# Altium PCB praline.PcbDoc (part 2 of 8)
Units mm, origin at the board's own origin, x right, y up, seen from the top; angles counter-clockwise.
Board outline 152.4 x 101.6 mm, 6 copper layers (In2.Cu, F.Cu, B.Cu, In1.Cu, In3.Cu, In4.Cu); 581 components, 490 nets, 2812 pads, 953 vias.
Unrouted connection lines stored in the file: 404.
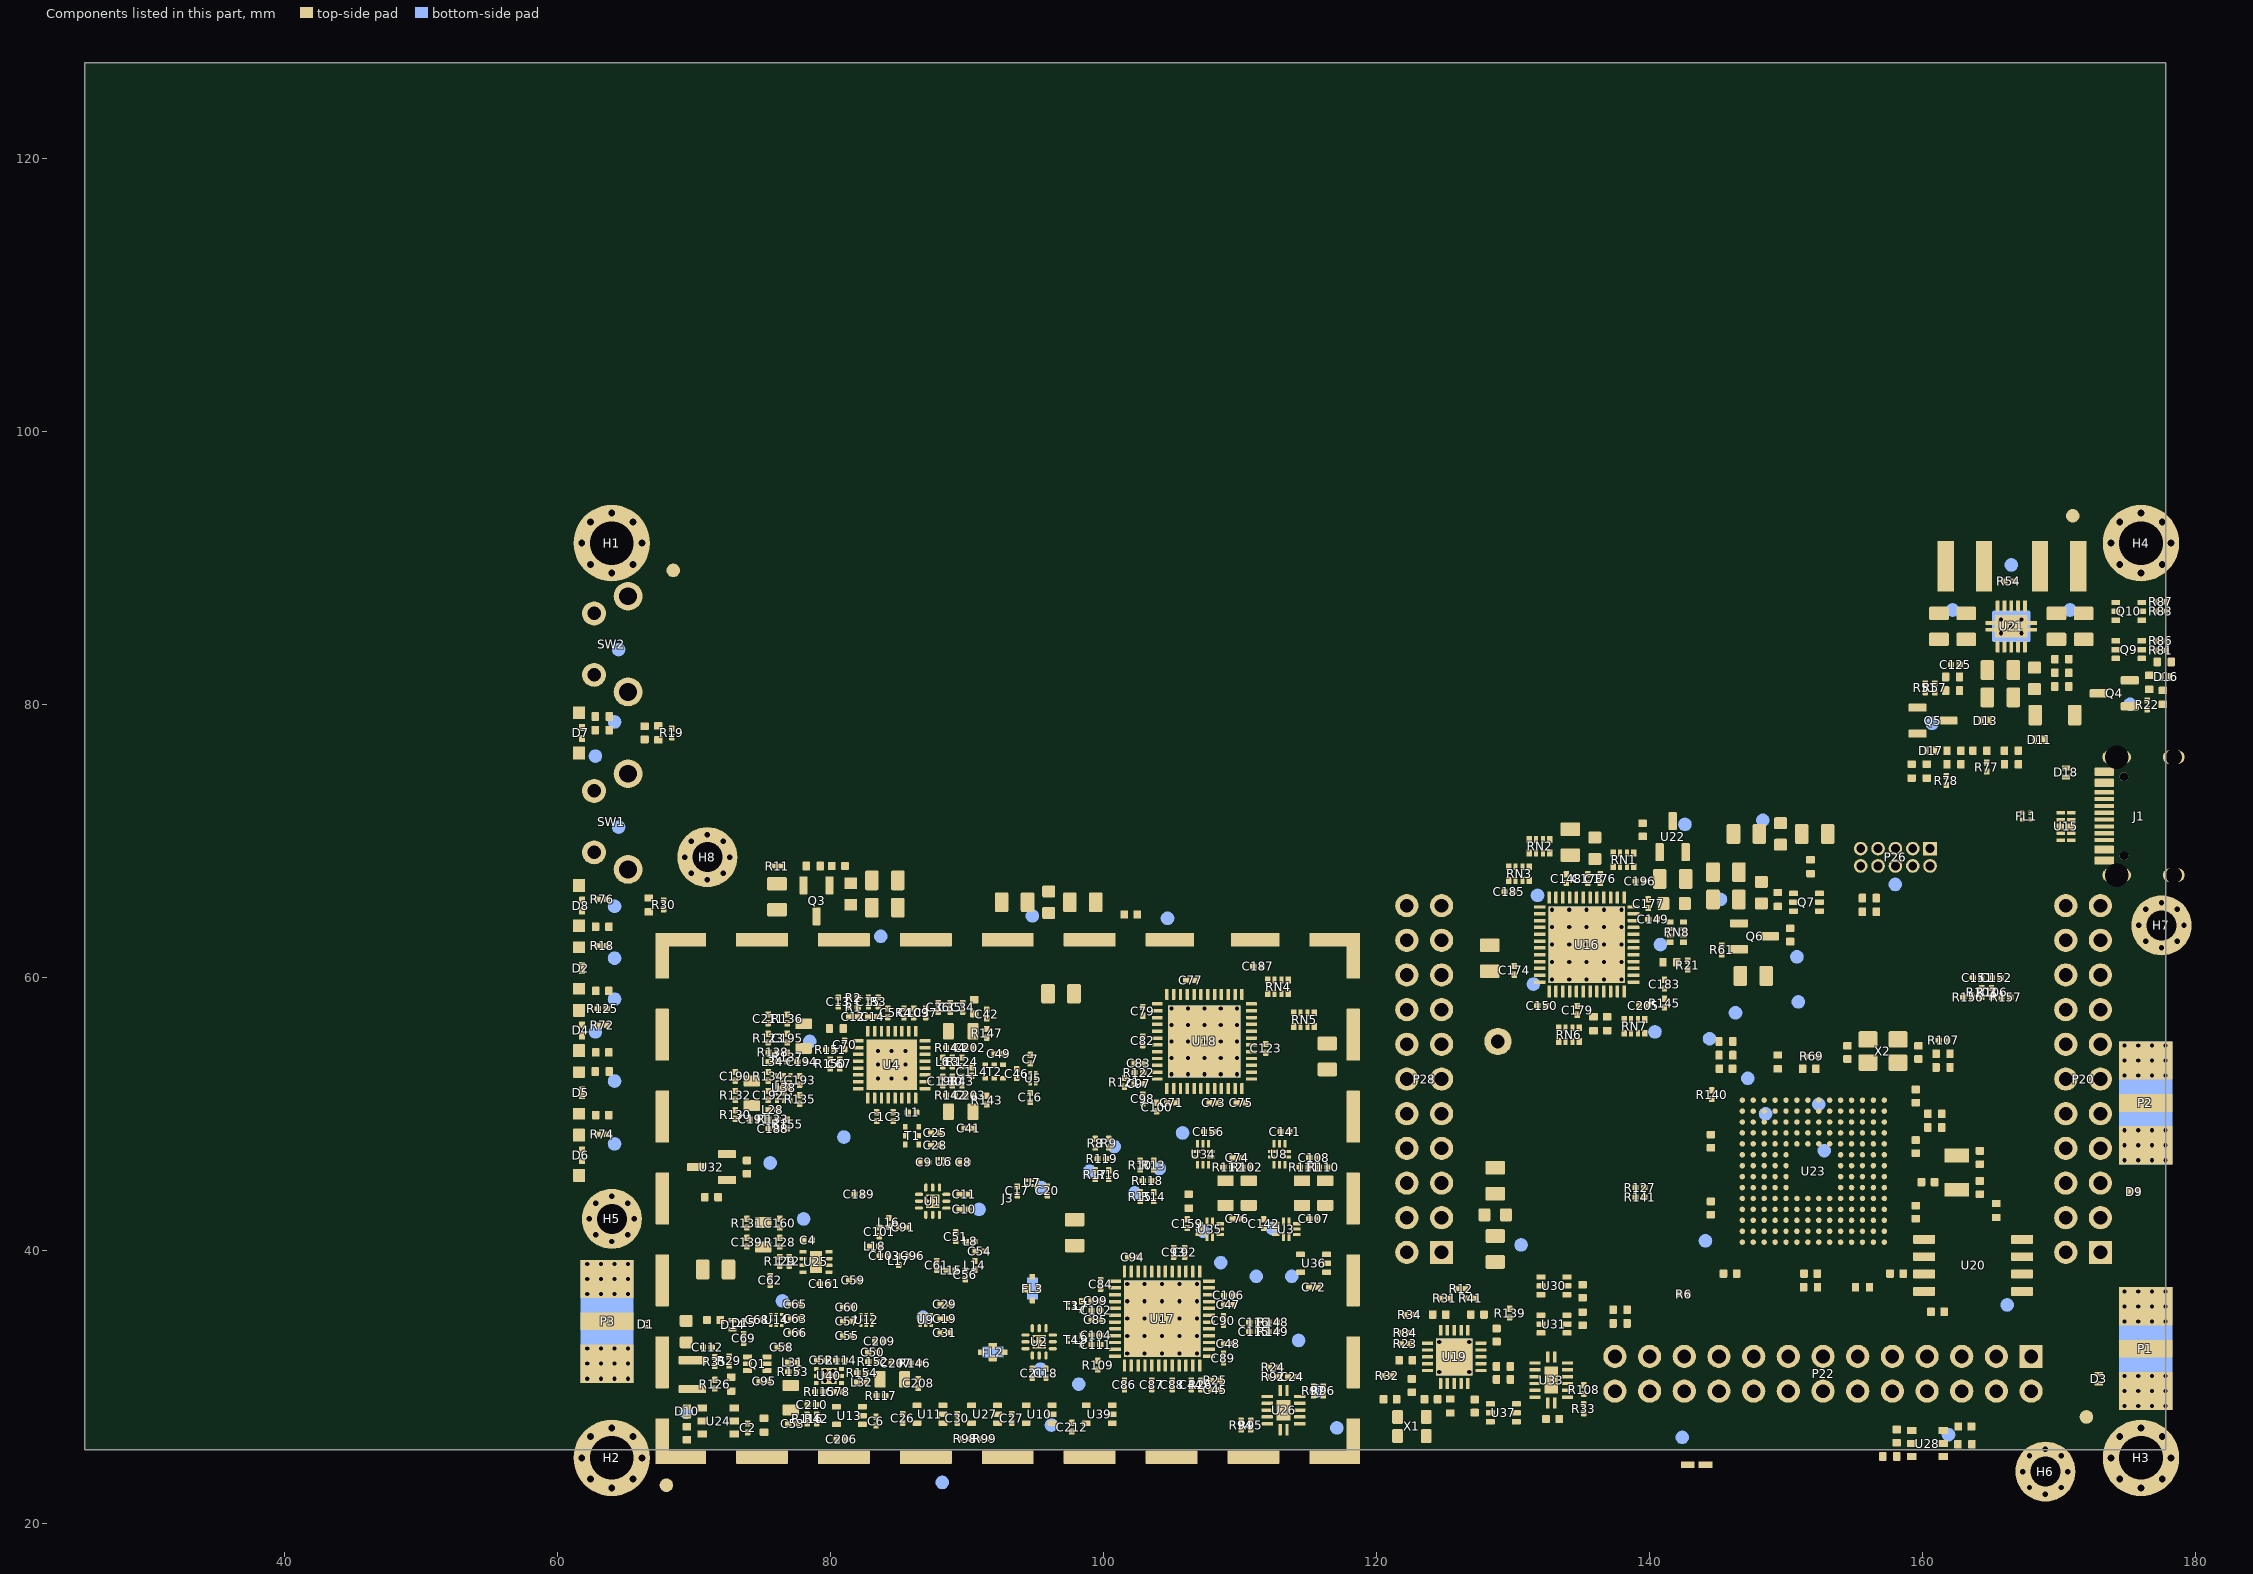
[diagram p6: the components of this part, seen from the top]

## Components (designator, comment, footprint, x,y, rotation, side; value= is the part's Value field where it differs from the comment) (continued)
R119 "Comment" R_0201_0603Metric 99.9,46.72 r180 top value=DNP
R120 "Comment" R_0402_1005Metric 80.45,56.27 r0 top value=10k
R121 "Comment" R_0201_0603Metric 101.55,52.32 r90 top value=12k
R122 "Comment" R_0201_0603Metric 102.6,53.02 r180 top value=4.7k
R123 "Comment" R_0201_0603Metric 75.45,55.57 r90 top value=10
R124 "Comment" R_0201_0603Metric 89.65,53.82 r270 top value=220
R125 "Comment" R_0201_0603Metric 63.3,57.72 r0 top value=12k
R126 "Comment" R_0201_0603Metric 71.55,30.22 r90 top value=4.7k
R127 "Comment" R_0201_0603Metric 139.3,44.62 r0 top value=100
R128 "Comment" R_0201_0603Metric 76.3,40.62 r90 top value=220
R129 "Comment" R_0201_0603Metric 76.3,39.22 r90 top value=1k
R130 "Comment" R_0201_0603Metric 73.05,49.97 r270 top value=220
R131 "Comment" R_0201_0603Metric 73.9,42.02 r270 top value=220
R132 "Comment" R_0201_0603Metric 73.05,51.37 r90 top value=470
R133 "Comment" R_0201_0603Metric 75.8,49.62 r180 top value=1k
R134 "Comment" R_0201_0603Metric 75.45,52.77 r270 top value=180
R135 "Comment" R_0201_0603Metric 77.75,51.07 r90 top value=12k
R136 "Comment" R_0201_0603Metric 76.85,56.97 r270 top value=220
R137 "Comment" R_0201_0603Metric 76.85,54.17 r270 top value=470
R138 "Comment" R_0201_0603Metric 75.8,54.52 r0 top value=1k
R139 "Comment" R_0201_0603Metric 129.75,35.42 r270 top value=33
R140 "Comment" R_0201_0603Metric 144.55,51.42 r90 top value=100
R141 "Comment" R_0201_0603Metric 139.3,43.92 r180 top value=100
R142 "Comment" R_0201_0603Metric 88.8,51.37 r180 top value=33
R143 "Comment" R_0201_0603Metric 91.45,51.02 r90 top value=100
R144 "Comment" R_0201_0603Metric 88.8,54.87 r180 top value=1k
R145 "Comment" R_0201_0603Metric 141.1,58.12 r90 top value=100
R146 "Comment" R_0201_0603Metric 86.2,31.77 r180 top value=220
R147 "Comment" R_0201_0603Metric 91.45,55.92 r90 top value=220
R148 "Comment" R_0201_0603Metric 112.4,34.77 r180 top value=100
R149 "Comment" R_0201_0603Metric 112.4,34.07 r0 top value=0
R150 "Comment" R_0201_0603Metric 80,53.67 r90 top value=0
R151 "Comment" R_0201_0603Metric 80,54.72 r180 top value=1k
R152 "Comment" R_0201_0603Metric 83.1,31.87 r180 top value=3
R153 "Comment" R_0201_0603Metric 77.25,31.12 r180 top value=1k
R154 "Comment" R_0201_0603Metric 82.3,31.07 r0 top value=1k
R155 "Comment" R_0201_0603Metric 76.85,49.27 r270 top value=10
R156 "Comment" R_0201_0603Metric 163.3,58.57 r180 top value=330
R157 "Comment" R_0201_0603Metric 166.1,58.57 r0 top value=330
RN1 "Comment" R_Array_Convex_4x0402 138.1,68.62 r90 top value=100
RN2 "Comment" R_Array_Convex_4x0402 131.95,69.62 r90 top value=100
RN3 "Comment" R_Array_Convex_4x0402 130.45,67.62 r90 top value=100
RN4 "Comment" R_Array_Convex_4x0402 112.8,59.32 r270 top value=100
RN5 "Comment" R_Array_Convex_4x0402 114.7,56.92 r270 top value=100
RN6 "Comment" R_Array_Convex_4x0402 134.1,55.82 r270 top value=100
RN7 "Comment" R_Array_Convex_4x0402 138.9,56.42 r270 top value=100
RN8 "Comment" R_Array_Convex_4x0402 142,63.32 r0 top value=100
SW1 "Comment" SW_Tactile_SPST_Angled_PTS645Vx58-2LFS 62.7,69.17 r90 top value=SWITCH
SW2 "Comment" SW_Tactile_SPST_Angled_PTS645Vx58-2LFS 62.7,82.17 r90 top value=SWITCH
T1 "Comment" Anaren_0805_2012Metric-6 86,48.42 r180 top value=RF_BALUN
T2 "Comment" Anaren_0805_2012Metric-6 92,53.12 r270 top value=RF_BALUN
T3 "Comment" Balun_TDK_TFSZ06052460-3310A2X 97.65,35.97 r0 top value=IF_BALUN
T4 "Comment" Balun_TDK_TFSZ06052460-3310A2X 97.65,33.47 r0 top value=IF_BALUN
TP1 "Comment" TestPoint_Pad_D1.0mm 142.6,71.22 r0 bottom value=TestPoint
TP2 "Comment" TestPoint_Pad_D1.0mm 145.2,65.72 r0 bottom value=TestPoint
TP3 "Comment" TestPoint_Pad_D1.0mm 75.6,46.42 r0 bottom value=TestPoint
TP4 "Comment" TestPoint_Pad_D1.0mm 83.7,63.02 r0 bottom value=TestPoint
TP5 "Comment" TestPoint_Pad_D1.0mm 148.5,50.02 r0 bottom value=TestPoint
TP6 "Comment" TestPoint_Loop_D1.80mm_Drill1.0mm_Beaded 128.9,55.32 r0 top value=TestPoint
TP7 "Comment" TestPoint_Pad_D1.0mm 64.2,78.72 r0 bottom value=TestPoint
TP8 "Comment" TestPoint_Pad_D1.0mm 62.8,76.22 r0 bottom value=TestPoint
TP9 "Comment" TestPoint_Pad_D1.0mm 64.2,65.22 r0 bottom value=TestPoint
TP10 "Comment" TestPoint_Pad_D1.0mm 64.2,61.42 r0 bottom value=TestPoint
TP11 "Comment" TestPoint_Pad_D1.0mm 64.2,58.42 r0 bottom value=TestPoint
TP12 "Comment" TestPoint_Pad_D1.0mm 62.8,56.02 r0 bottom value=TestPoint
TP13 "Comment" TestPoint_Pad_D1.0mm 64.2,52.42 r0 bottom value=TestPoint
TP14 "Comment" TestPoint_Pad_D1.0mm 64.2,47.82 r0 bottom value=TestPoint
TP15 "Comment" TestPoint_Pad_D1.0mm 94.8,64.52 r0 bottom value=TestPoint
TP16 "Comment" TestPoint_Pad_D1.0mm 130.6,40.42 r0 bottom value=TestPoint
TP17 "Comment" TestPoint_Pad_D1.0mm 161.9,26.52 r0 bottom value=TestPoint
TP18 "Comment" TestPoint_Pad_D1.0mm 162.2,86.92 r0 bottom value=TestPoint
TP19 "Comment" TestPoint_Pad_D1.0mm 170.8,86.92 r0 bottom value=TestPoint
TP20 "Comment" TestPoint_Pad_D1.0mm 175.2,80.02 r0 bottom value=TestPoint
TP21 "Comment" TestPoint_Pad_D1.0mm 160.7,78.62 r0 bottom value=TestPoint
TP22 "Comment" TestPoint_Pad_D1.0mm 148.3,71.52 r0 bottom value=TestPoint
TP23 "Comment" TestPoint_Pad_D1.0mm 166.5,90.22 r0 bottom value=TestPoint
TP24 "Comment" TestPoint_Pad_D1.0mm 147.2,52.62 r0 bottom value=TestPoint
TP25 "Comment" TestPoint_Pad_D1.0mm 152.8,47.32 r0 bottom value=TestPoint
TP26 "Comment" TestPoint_Pad_D1.0mm 150.9,58.22 r0 bottom value=TestPoint
TP27 "Comment" TestPoint_Pad_D1.0mm 158,66.82 r0 bottom value=TestPoint
TP28 "Comment" TestPoint_Pad_D1.0mm 150.8,61.52 r0 bottom value=TestPoint
TP29 "Comment" TestPoint_Pad_D1.0mm 131.8,66.02 r0 bottom value=TestPoint
TP30 "Comment" TestPoint_Pad_D1.0mm 64.5,84.02 r0 bottom value=TestPoint
TP31 "Comment" TestPoint_Pad_D1.0mm 64.5,71.02 r0 bottom value=TestPoint
TP32 "Comment" TestPoint_Pad_D1.0mm 144.1,40.72 r0 bottom value=TestPoint
TP33 "Comment" TestPoint_Pad_D1.0mm 114.3,33.42 r0 bottom value=TestPoint
TP34 "Comment" TestPoint_Pad_D1.0mm 78.5,55.32 r0 bottom value=TestPoint
TP35 "Comment" TestPoint_Pad_D1.0mm 95.45,44.62 r0 bottom value=TestPoint
TP36 "Comment" TestPoint_Pad_D1.0mm 152.4,50.72 r0 bottom value=TestPoint
TP37 "Comment" TestPoint_Pad_D1.0mm 96.2,27.22 r0 bottom value=TestPoint
TP38 "Comment" TestPoint_Pad_D1.0mm 90.9,43.02 r0 bottom value=TestPoint
TP39 "Comment" TestPoint_Pad_D1.0mm 95.4,31.32 r0 bottom value=TestPoint
TP40 "Comment" TestPoint_Pad_D1.0mm 86.8,35.12 r0 bottom value=TestPoint
TP41 "Comment" TestPoint_Pad_D1.0mm 76.5,36.32 r0 bottom value=TestPoint
TP42 "Comment" TestPoint_Pad_D1.0mm 78.05,42.32 r0 bottom value=TestPoint
TP43 "Comment" TestPoint_Pad_D1.0mm 142.4,26.32 r0 bottom value=TestPoint
TP44 "Comment" TestPoint_Pad_D1.0mm 117.1,27.02 r0 bottom value=TestPoint
TP45 "Comment" TestPoint_Pad_D1.0mm 88.2,23.02 r0 bottom value=TestPoint
TP46 "Comment" TestPoint_Pad_D1.0mm 115.6,29.72 r0 bottom value=TestPoint
TP47 "Comment" TestPoint_Pad_D1.0mm 69.45,28.17 r0 bottom value=TestPoint
TP48 "Comment" TestPoint_Pad_D1.0mm 146.3,57.42 r0 bottom value=TestPoint
TP49 "Comment" TestPoint_Pad_D1.0mm 140.8,62.42 r0 bottom value=TestPoint
TP50 "Comment" TestPoint_Pad_D1.0mm 144.4,55.52 r0 bottom value=TestPoint
TP51 "Comment" TestPoint_Pad_D1.0mm 104.7,64.34 r0 bottom value=TestPoint
TP52 "Comment" TestPoint_Pad_D1.0mm 98.2,30.22 r0 bottom value=TestPoint
TP53 "Comment" TestPoint_Pad_D1.0mm 140.4,56.02 r0 bottom value=TestPoint
TP54 "Comment" TestPoint_Pad_D1.0mm 112.4,41.62 r0 bottom value=TestPoint
TP55 "Comment" TestPoint_Pad_D1.0mm 105.8,48.62 r0 bottom value=TestPoint
TP56 "Comment" TestPoint_Pad_D1.0mm 100.8,47.62 r0 bottom value=TestPoint
TP57 "Comment" TestPoint_Pad_D1.0mm 99,45.82 r0 bottom value=TestPoint
TP58 "Comment" TestPoint_Pad_D1.0mm 102.3,44.22 r0 bottom value=TestPoint
TP59 "Comment" TestPoint_Pad_D1.0mm 104.1,46.02 r0 bottom value=TestPoint
TP60 "Comment" TestPoint_Pad_D1.0mm 111.2,38.12 r0 bottom value=TestPoint
TP61 "Comment" TestPoint_Pad_D1.0mm 113.8,38.12 r0 bottom value=TestPoint
TP62 "Comment" TestPoint_Pad_D1.0mm 107.3,41.42 r0 bottom value=TestPoint
TP63 "Comment" TestPoint_Pad_D1.0mm 108.6,39.12 r0 bottom value=TestPoint
TP64 "Comment" TestPoint_Pad_D1.0mm 166.2,36.02 r0 bottom value=TestPoint
TP65 "Comment" TestPoint_Pad_D1.0mm 131.5,59.52 r0 bottom value=TestPoint
TP66 "Comment" TestPoint_Pad_D1.0mm 81,48.32 r0 bottom value=TestPoint
U1 "Comment" QFN-12-1EP_2x2mm_P0.5mm_EP1x1mm 87.5,43.62 r180 top value=MXD8546F
U2 "Comment" QFN-12-1EP_2x2mm_P0.5mm_EP1x1mm 95.3,33.32 r90 top value=MXD8546F
U3 "Comment" GTIC_UQFN-10_1.4x1.8mm_P0.4mm 113.4,41.57 r90 top value=GT4227
U4 "Comment" QFN-32-1EP_5x5mm_P0.5mm_EP3.7x3.7mm_ThermalVias 84.5,53.62 r270 top value=RFFC5072
U5 "Comment" TSLP-6-4_1.1x0.7mm_P0.4mm 94.85,52.62 r180 top value=FM8625H
U6 "Comment" TSLP-6-4_1.1x0.7mm_P0.4mm 88.3,46.52 r90 top value=FM8625H
U7 "Comment" TSLP-6-4_1.1x0.7mm_P0.4mm 94.8,44.97 r270 top value=FM8625H
U8 "Comment" GTIC_UQFN-10_1.4x1.8mm_P0.4mm 112.9,47.07 r0 top value=GT4227
U9 "Comment" MXD8638C 87,34.92 r270 top value=MXD8638C
U10 "Comment" SOT-353_SC-70-5 95.3,28.02 r180 top value=74LVC1G86
U11 "Comment" SOT-353_SC-70-5 87.3,28.02 r180 top value=74LVC1G86
U12 "Comment" MXD8638C 82.65,34.92 r90 top value=MXD8638C
U13 "Comment" SOT-353_SC-70-5 81.4,27.92 r180 top value=74LVC1G86
U14 "Comment" MXD8638C 76.05,34.92 r270 top value=MXD8638C
U15 "Comment" Diodes_UDFN-10_1.0x2.5mm_P0.5mm 170.5,71.07 r180 top value=TVS_USB
U16 "Comment" QFN-48-1EP_7x7mm_P0.5mm_EP5.6x5.6mm_ThermalVias 135.4,62.42 r90 top value=ICE40UP5K
U17 "Comment" QFN-48-1EP_7x7mm_P0.5mm_EP5.6x5.6mm_ThermalVias 104.3,35.02 r0 top value=MAX2831
U18 "Comment" QFN-48-1EP_7x7mm_P0.5mm_EP5.3x5.3mm_ThermalVias 107.4,55.32 r90 top value=MAX5865
U19 "Comment" QFN-20-1EP_4x4mm_P0.5mm_EP2.7x2.7mm_ThermalVias 125.7,32.22 r90 top value=SI5351C
U20 "Comment" SOIC-8_5.3x5.3mm_P1.27mm 163.7,38.92 r180 top value=W25Q32
U21 "Comment" Texas_S-PVSON-N10_ThermalVias 166.5,85.72 r90 top value=TPS62410
U22 "Comment" SOT-23-3 141.7,70.32 r90 top value=LDO_2V5
U23 "Comment" TFBGA-180_12x12mm_Layout14x14_P0.8mm 152,45.82 r270 top value=LPC4330FET180
U24 "Comment" TSOP-6_1.65x3.05mm_P0.95mm 71.8,27.52 r180 top value=AP22652
U25 "Comment" WSON-8-1EP_2x2mm_P0.5mm_EP0.9x1.6mm 78.95,39.17 r180 top value=TRF37C73
U26 "Comment" DHVQFN-14-1EP_2.5x3mm_P0.5mm_EP1x1.5mm 113.2,28.32 r0 top value=74HC00
U27 "Comment" SOT-353_SC-70-5 91.3,28.02 r180 top value=74LVC1G32
U28 "Comment" TSOP-6_1.65x3.05mm_P0.95mm 160.36,25.87 r0 top value=AP22652
U30 "Comment" SOT-363_SC-70-6 133,37.42 r0 top value=74LVC1G3157
U31 "Comment" SOT-363_SC-70-6 133,34.62 r0 top value=74LVC1G3157
U32 "Comment" SOT-23-3 71.3,46.12 r180 top value=LDO_2V5
U33 "Comment" DHVQFN-16-1EP_2.5x3.5mm_P0.5mm_EP1x2mm 132.8,30.52 r180 top value=74HC4051
U34 "Comment" GTIC_UQFN-10_1.4x1.8mm_P0.4mm 107.3,47.07 r0 top value=GT4227
U35 "Comment" GTIC_UQFN-10_1.4x1.8mm_P0.4mm 107.8,41.57 r90 top value=GT4227
U36 "Comment" SOT-353_SC-70-5 115.4,39.07 r180 top value=74LVC1G86
U37 "Comment" SOT-363_SC-70-6 129.3,28.12 r180 top value=74LVC1G3157
U38 "Comment" TSLP-7-1 76.6,51.92 r180 top value=BGB741L7ESD
U39 "Comment" SOT-353_SC-70-5 99.7,28.02 r180 top value=74LVC1G08
U40 "Comment" TSLP-7-1 79.9,30.82 r270 top value=BGB741L7ESD
X1 "Comment" Oscillator_SMD_SeikoEpson_TG2520SMN-xxx-xxxxxx-4Pin_2.5x2.0mm 122.6,27.12 r90 top value=TCXO
X2 "Comment" Crystal_SMD_3225-4Pin_3.2x2.5mm 157.1,54.62 r270 top value=MCU_XTAL
X3 "Comment" Crystal_SMD_3215-2Pin_3.2x1.5mm 162.5,45.72 r270 top value=RTC_XTAL

## Footprints (in the part's own frame and the unit in brackets; to place one, negate y for a bottom-side part, rotate by r counter-clockwise, add the part's x,y. Pads: shape width x height; smd on the part's side, far side on the other; paste and mask are expansions set on the pad)
Anaren_0805_2012Metric-6 [mm]
  rect 0.33x0.41 smd mask+0.05: 1(-0.495,0.65) 2(-0.495,0) 3(-0.495,-0.65) 4(0.495,-0.65) 5(0.495,0) 6(0.495,0.65)
  silkscreen extent -1.04,-1.12 0.64,1.4
Balun_TDK_TFSZ06052460-3310A2X [mm]
  rrect5% 0.18x0.2 smd mask+0.05: 1(-0.19,0.2) 2(-0.19,-0.2) 3(0.19,-0.2) 4(0.19,0.2)
  silkscreen extent -0.65,0.05 -0.45,0.45
C_0201_0603Metric [mm]
  rrect25% 0.46x0.4 smd paste-0.46 mask+0.05: 1(-0.32,0) 2(0.32,0)
  rrect25% 0.318x0.36 on Top Paste mask-0.36: Un1(-0.345,0) Un2(0.345,0)
C_0402_1005Metric [mm]
  rrect25% 0.56x0.62 smd mask+0.05: 1(-0.48,0) 2(0.48,0)
  silkscreen extent -0.11,-0.36 0.11,0.36
C_0805_2012Metric [mm]
  rrect25% 1x1.45 smd mask+0.05: 1(-0.95,0) 2(0.95,0)
  silkscreen extent -0.26,-0.73 0.26,0.73
Crystal_SMD_3215-2Pin_3.2x1.5mm [mm]
  rect 1x1.8 smd mask+0.05: 1(-1.25,0) 2(1.25,0)
  silkscreen extent -0.6,-0.87 0.6,0.87
Crystal_SMD_3225-4Pin_3.2x2.5mm [mm]
  rrect21% 1.2x1.4 smd mask+0.05: 1(-0.85,1.1) 2(-0.85,-1.1) 3(0.85,-1.1) 4(0.85,1.1)
  silkscreen extent -1.85,-0.25 1.4,1.8
D_SOD-123FL [mm]
  rrect25% 1x1.5 smd mask+0.05: 1(-1.45,0) 2(1.45,0)
  silkscreen extent -2.2,-1 1.65,1
DHVQFN-14-1EP_2.5x3mm_P0.5mm_EP1x1.5mm [mm]
  rrect25% 0.25x0.825 smd mask+0.05: 1(-0.25,1.438) 7(-0.25,-1.438) 8(0.25,-1.438) 14(0.25,1.438)
  rrect25% 0.825x0.25 smd mask+0.05: 2(-1.188,1) 3(-1.188,0.5) 4(-1.188,0) 5(-1.188,-0.5) 6(-1.188,-1) 9(1.188,-1) 10(1.188,-0.5) 11(1.188,0) 12(1.188,0.5) 13(1.188,1)
  rect 1x1.5 smd paste-1.5 mask+0.05: 15(0,0)
  rrect25% 0.81x1.21 on Top Paste mask-1.21: Un1(0,0)
  silkscreen extent -1.6,-1.61 1.36,1.94
DHVQFN-16-1EP_2.5x3.5mm_P0.5mm_EP1x2mm [mm]
  rrect25% 0.25x0.825 smd mask+0.05: 1(-0.25,1.687) 8(-0.25,-1.687) 9(0.25,-1.687) 16(0.25,1.687)
  rrect25% 0.825x0.25 smd mask+0.05: 2(-1.188,1.25) 3(-1.188,0.75) 4(-1.188,0.25) 5(-1.188,-0.25) 6(-1.188,-0.75) 7(-1.188,-1.25) 10(1.188,-1.25) 11(1.188,-0.75) 12(1.188,-0.25) 13(1.188,0.25) 14(1.188,0.75) 15(1.188,1.25)
  rect 1x2 smd paste-2 mask+0.05: 17(0,0)
  rrect25% 0.81x0.81 on Top Paste mask-0.81: Un1(0,0.5) Un2(0,-0.5)
  silkscreen extent -1.6,-1.86 1.36,2.19
Diodes_UDFN-10_1.0x2.5mm_P0.5mm [mm]
  rect 0.625x0.25 smd mask+0.05: 1(-0.387,1) 2(-0.387,0.5) 4(-0.387,-0.5) 5(-0.387,-1) 6(0.387,-1) 7(0.387,-0.5) 9(0.387,0.5) 10(0.387,1)
  rect 0.7x0.45 smd mask+0.05: 3(-0.35,0)
  rect 0.575x0.45 smd mask+0.05: 8(0.413,0)
  silkscreen extent -1.17,-1.36 0.5,1.59
Fiducial_1mm_Mask2mm [mm]
  round 1 smd paste-1 mask+0.5: Un1(0,0)
Filter_Pulse_BPF1608LM09R5000A [mm]
  rrect12% 0.425x0.4 smd mask+0.05: 1(-0.863,0) 3(0.863,0)
  rect 1.6x0.8 smd far side paste-1.6 mask-1.6: 2(0,0)
  rrect12% 0.6x0.425 smd mask+0.05: 2(0,-0.463) 4(0,0.463)
  silkscreen extent -1.33,-0.93 0.9,0.5
GTIC_UQFN-10_1.4x1.8mm_P0.4mm [mm]
  rrect25% 0.663x0.225 smd mask+0.05: 1(-0.519,0.2)
  rrect25% 0.563x0.225 smd mask+0.05: 2(-0.569,-0.2) 6(0.569,-0.2) 7(0.569,0.2)
  rrect25% 0.225x0.563 smd mask+0.05: 3(-0.4,-0.768) 4(0,-0.768) 5(0.4,-0.768) 8(0.4,0.768) 9(0,0.768) 10(-0.4,0.768)
  silkscreen extent -1.14,-1.01 0.81,1.34
L_0201_0603Metric [mm]
  rrect25% 0.46x0.4 smd paste-0.46 mask+0.05: 1(-0.32,0) 2(0.32,0)
  rrect25% 0.318x0.36 on Top Paste mask-0.36: Un1(-0.345,0) Un2(0.345,0)
L_0603_1608Metric [mm]
  rrect25% 0.875x0.95 smd mask+0.05: 1(-0.787,0) 2(0.787,0)
  silkscreen extent -0.16,-0.51 0.16,0.51
L_CommonModeChoke_Murata_DLM0NS [mm]
  rrect5% 0.3x0.3 smd mask+0.05: 1(-0.3,0.25) 2(0.3,0.25) 3(-0.3,-0.25) 4(0.3,-0.25)
  silkscreen extent -0.85,-0.53 0.33,0.55
L_Taiyo-Yuden_A251818 [mm]
  rrect20% 0.6x2 smd mask+0.05: 1(-1.05,0) 2(1.05,0)
  silkscreen extent -0.55,-1 0.55,1
L_Taiyo-Yuden_NR-40xx [mm]
  rect 1.2x3.7 smd mask+0.05: 1(-1.4,0) 2(1.4,0)
  silkscreen extent -2,-2.1 2,2.1
L_TDK_MLZ2012_h1.25mm [mm]
  rrect20% 0.8x1.2 smd mask+0.05: 1(-0.9,0) 2(0.9,0)
  silkscreen extent -0.35,-0.7 0.35,0.7
Laird_Technologies_BMI-S-230-F_50.8x38.1mm [mm]
  rrect12% 1x3.35 smd mask+0.05: 1(-25.3,-17.775) 1(-25.3,17.775) 1(25.3,-17.775) 1(25.3,17.775)
  rrect12% 1x3.8 smd mask+0.05: 1(-25.3,-12) 1(-25.3,-6) 1(-25.3,0) 1(-25.3,6) 1(-25.3,12) 1(25.3,-12) 1(25.3,-6) 1(25.3,0) 1(25.3,6) 1(25.3,12)
  rrect12% 3.7x1 smd mask+0.05: 1(-23.95,-18.95) 1(-23.95,18.95) 1(23.95,-18.95) 1(23.95,18.95)
  rrect12% 3.8x1 smd mask+0.05: 1(-18,-18.95) 1(-18,18.95) 1(-12,-18.95) 1(-12,18.95) 1(-6,-18.95) 1(-6,18.95) 1(0,-18.95) 1(0,18.95) 1(6,-18.95) 1(6,18.95) 1(12,-18.95) 1(18,-18.95)
  rrect12% 3.55x1 smd mask+0.05: 1(11.875,18.95) 1(18.125,18.95)
  silkscreen extent -25.75,-19.2 25.55,20.05
LED_Dual_Xinglight_XL-3210_Horizontal [mm]
  rrect12% 0.5x0.44 smd mask+0.05: 1(0.4,-0.55) 2(-0.4,-0.55)
  rrect12% 0.95x0.88 smd mask+0.05: 3(1.475,-0.33) 4(-1.475,-0.33)
  silkscreen extent -2.15,-0.97 1.15,1.13
LED_Single_Xinglight_XL-3210_Horizontal [mm]
  rrect12% 0.85x0.88 smd mask+0.05: 1(-1.525,-0.33) 2(1.525,-0.33)
  rrect12% 0.9x0.44 smd mask+0.05: Un1(0,-0.55)
  silkscreen extent -2.15,-0.97 1.15,1.13
MountingHole_2.2mm_M2_Pad_Via [mm]
  round 0.7 hole 0.4 mask+0.05: 1(-1.65,0) 1(-1.167,-1.167) 1(-1.167,1.167) 1(0,-1.65) 1(0,1.65) 1(1.167,-1.167) 1(1.167,1.167) 1(1.65,0)
  round 4.4 hole 2.2 mask+0.05: 1(0,0)
MountingHole_3.2mm_M3_Pad_Via [mm]
  round 0.8 hole 0.5 mask+0.05: 1(-2.2,0) 1(-1.556,-1.556) 1(-1.556,1.556) 1(0,-2.2) 1(0,2.2) 1(1.556,-1.556) 1(1.556,1.556) 1(2.2,0)
  round 5.6 hole 3.2 mask+0.05: 1(0,0)
MXD8638C [mm]
  rrect12% 0.25x0.25 smd mask+0.05: 1(-0.4,0.4) 2(-0.4,0) 3(-0.4,-0.4) 4(0,-0.4) 5(0.4,-0.4) 6(0.4,0) 7(0.4,0.4) 8(0,0.4) 9(0,0)
  silkscreen extent -0.9,-0.65 0.65,0.7
Oscillator_SMD_SeikoEpson_TG2520SMN-xxx-xxxxxx-4Pin_2.5x2.0mm [mm]
  rrect25% 1x0.8 smd mask+0.05: 1(-0.7,1.05) 2(-0.7,-1.05) 3(0.7,-1.05) 4(0.7,1.05)
  silkscreen extent -1.6,-0.32 1.11,1.25
PinHeader_2x05_P1.27mm_Vertical [mm]
  rect 1x1 hole 0.65 mask+0.05: 1(0,0)
  round 1 hole 0.65 mask+0.05: 2(1.27,0) 3(0,-1.27) 4(1.27,-1.27) 5(0,-2.54) 6(1.27,-2.54) 7(0,-3.81) 8(1.27,-3.81) 9(0,-5.08) 10(1.27,-5.08)
  silkscreen extent -1.18,-5.82 2.45,0.81
PinSocket_2x11_P2.54mm_Vertical_Flipped [mm]
  rect 1.7x1.7 hole 1 mask+0.05: 1(0,0)
  round 1.7 hole 1 mask+0.05: 2(2.54,0) 3(0,-2.54) 4(2.54,-2.54) 5(0,-5.08) 6(2.54,-5.08) 7(0,-7.62) 8(2.54,-7.62) 9(0,-10.16) 10(2.54,-10.16) 11(0,-12.7) 12(2.54,-12.7) 13(0,-15.24) 14(2.54,-15.24) 15(0,-17.78) 16(2.54,-17.78) 17(0,-20.32) 18(2.54,-20.32) 19(0,-22.86) 20(2.54,-22.86) 21(0,-25.4) 22(2.54,-25.4)
  silkscreen extent -1.33,-26.73 3.87,1.33
PinSocket_2x13_P2.54mm_Vertical_Flipped [mm]
  rect 1.7x1.7 hole 1 mask+0.05: 1(0,0)
  round 1.7 hole 1 mask+0.05: 2(2.54,0) 3(0,-2.54) 4(2.54,-2.54) 5(0,-5.08) 6(2.54,-5.08) 7(0,-7.62) 8(2.54,-7.62) 9(0,-10.16) 10(2.54,-10.16) 11(0,-12.7) 12(2.54,-12.7) 13(0,-15.24) 14(2.54,-15.24) 15(0,-17.78) 16(2.54,-17.78) 17(0,-20.32) 18(2.54,-20.32) 19(0,-22.86) 20(2.54,-22.86) 21(0,-25.4) 22(2.54,-25.4) 23(0,-27.94) 24(2.54,-27.94) 25(0,-30.48) 26(2.54,-30.48)
  silkscreen extent -1.33,-31.81 3.87,1.33
QFN-12-1EP_2x2mm_P0.5mm_EP1x1mm [mm]
  rrect100% 0.6x0.25 smd mask+0.05: 1(-1,0.5) 2(-1,0) 3(-1,-0.5) 7(1,-0.5) 8(1,0) 9(1,0.5)
  rrect100% 0.25x0.6 smd mask+0.05: 4(-0.5,-1) 5(0,-1) 6(0.5,-1) 10(0.5,1) 11(0,1) 12(-0.5,1)
  round 0.4 hole 0.3 mask+0.05: 13(-0.25,0.25) 13(-0.25,-0.25) 13(0.25,0.25) 13(0.25,-0.25)
  rect 1x1 smd mask+0.05: 13(0,0)
  silkscreen extent -1.35,-1.1 1.1,1.2
QFN-20-1EP_4x4mm_P0.5mm_EP2.7x2.7mm_ThermalVias [mm]
  rrect25% 0.8x0.25 smd mask+0.05: 1(-1.95,1) 2(-1.95,0.5) 3(-1.95,0) 4(-1.95,-0.5) 5(-1.95,-1) 11(1.95,-1) 12(1.95,-0.5) 13(1.95,0) 14(1.95,0.5) 15(1.95,1)
  rrect25% 0.25x0.8 smd mask+0.05: 6(-1,-1.95) 7(-0.5,-1.95) 8(0,-1.95) 9(0.5,-1.95) 10(1,-1.95) 16(1,1.95) 17(0.5,1.95) 18(0,1.95) 19(-0.5,1.95) 20(-1,1.95)
  round 0.5 hole 0.3 mask+0.05: 21(-1.1,-1.1) 21(-1.1,1.1) 21(1.1,-1.1) 21(1.1,1.1)
  rect 2.7x2.7 smd paste-2.7 mask+0.05: 21(0,0)
  rect 2.7x2.7 smd far side paste-2.7 mask-2.7: 21(0,0)
  rrect21% 1.17x1.17 on Top Paste mask-1.17: Un1(-0.675,0.675) Un2(-0.675,-0.675) Un3(0.675,0.675) Un4(0.675,-0.675)
  silkscreen extent -2.35,-2.11 2.11,2.44
QFN-32-1EP_5x5mm_P0.5mm_EP3.7x3.7mm_ThermalVias [mm]
  rrect25% 0.8x0.25 smd mask+0.05: 1(-2.45,1.75) 2(-2.45,1.25) 3(-2.45,0.75) 4(-2.45,0.25) 5(-2.45,-0.25) 6(-2.45,-0.75) 7(-2.45,-1.25) 8(-2.45,-1.75) 17(2.45,-1.75) 18(2.45,-1.25) 19(2.45,-0.75) 20(2.45,-0.25) 21(2.45,0.25) 22(2.45,0.75) 23(2.45,1.25) 24(2.45,1.75)
  rrect25% 0.25x0.8 smd mask+0.05: 9(-1.75,-2.45) 10(-1.25,-2.45) 11(-0.75,-2.45) 12(-0.25,-2.45) 13(0.25,-2.45) 14(0.75,-2.45) 15(1.25,-2.45) 16(1.75,-2.45) 25(1.75,2.45) 26(1.25,2.45) 27(0.75,2.45) 28(0.25,2.45) 29(-0.25,2.45) 30(-0.75,2.45) 31(-1.25,2.45) 32(-1.75,2.45)
  round 0.5 hole 0.3 mask+0.05: 33(-1,1) 33(-1,0) 33(-1,-1) 33(0,1) 33(0,0) 33(0,-1) 33(1,1) 33(1,0) 33(1,-1)
  rect 3.7x3.7 smd paste-3.7 mask+0.05: 33(0,0)
  rect 2.5x2.5 smd far side paste-2.5 mask-2.5: 33(0,0)
  round 0.602 on Top Paste mask-0.602: Un1(-1.425,1.425) Un4(-1.425,-1.425) Un13(1.425,1.425) Un16(1.425,-1.425)
  round 0.612 on Top Paste mask-0.612: Un2(-1.425,0.5) Un3(-1.425,-0.5) Un5(-0.5,1.425) Un8(-0.5,-1.425) Un9(0.5,1.425) Un12(0.5,-1.425) Un14(1.425,0.5) Un15(1.425,-0.5)
  rrect25% 0.806x0.806 on Top Paste mask-0.806: Un6(-0.5,0.5) Un7(-0.5,-0.5) Un10(0.5,0.5) Un11(0.5,-0.5)
  silkscreen extent -2.85,-2.61 2.61,2.94
QFN-48-1EP_7x7mm_P0.5mm_EP5.3x5.3mm_ThermalVias [mm]
  rrect25% 0.8x0.25 smd mask+0.05: 1(-3.45,2.75) 2(-3.45,2.25) 3(-3.45,1.75) 4(-3.45,1.25) 5(-3.45,0.75) 6(-3.45,0.25) 7(-3.45,-0.25) 8(-3.45,-0.75) 9(-3.45,-1.25) 10(-3.45,-1.75) 11(-3.45,-2.25) 12(-3.45,-2.75) 25(3.45,-2.75) 26(3.45,-2.25) 27(3.45,-1.75) 28(3.45,-1.25) 29(3.45,-0.75) 30(3.45,-0.25) 31(3.45,0.25) 32(3.45,0.75) 33(3.45,1.25) 34(3.45,1.75) 35(3.45,2.25) 36(3.45,2.75)
  rrect25% 0.25x0.8 smd mask+0.05: 13(-2.75,-3.45) 14(-2.25,-3.45) 15(-1.75,-3.45) 16(-1.25,-3.45) 17(-0.75,-3.45) 18(-0.25,-3.45) 19(0.25,-3.45) 20(0.75,-3.45) 21(1.25,-3.45) 22(1.75,-3.45) 23(2.25,-3.45) 24(2.75,-3.45) 37(2.75,3.45) 38(2.25,3.45) 39(1.75,3.45) 40(1.25,3.45) 41(0.75,3.45) 42(0.25,3.45) 43(-0.25,3.45) 44(-0.75,3.45) 45(-1.25,3.45) 46(-1.75,3.45) 47(-2.25,3.45) 48(-2.75,3.45)
  round 0.5 hole 0.3 mask+0.05: 49(-2.4,-2.4) 49(-2.4,-1.2) 49(-2.4,0) 49(-2.4,1.2) 49(-2.4,2.4) 49(-1.2,2.4) 49(-1.2,-1.2) 49(-1.2,0) 49(-1.2,1.2) 49(-1.2,-2.4) 49(0,2.4) 49(0,1.2) 49(0,0) 49(0,-1.2) 49(0,-2.4) 49(1.2,2.4) 49(1.2,-1.2) 49(1.2,0) 49(1.2,1.2) 49(1.2,-2.4) 49(2.4,-2.4) 49(2.4,-1.2) 49(2.4,0) 49(2.4,1.2) 49(2.4,2.4)
  rect 5.3x5.3 smd paste-5.3 mask+0.05: 49(0,0)
  rect 5.3x5.3 smd far side paste-5.3 mask-5.3: 49(0,0)
  rrect24% 1.026x1.026 on Top Paste mask-1.026: Un1(-1.8,1.8) Un2(-1.8,0.6) Un3(-1.8,-0.6) Un4(-1.8,-1.8) Un5(-0.6,1.8) Un6(-0.6,0.6) Un7(-0.6,-0.6) Un8(-0.6,-1.8) Un9(0.6,1.8) Un10(0.6,0.6) Un11(0.6,-0.6) Un12(0.6,-1.8) Un13(1.8,1.8) Un14(1.8,0.6) Un15(1.8,-0.6) Un16(1.8,-1.8)
  silkscreen extent -3.85,-3.61 3.61,3.94
QFN-48-1EP_7x7mm_P0.5mm_EP5.6x5.6mm_ThermalVias [mm]
  rrect25% 0.875x0.25 smd mask+0.05: 1(-3.437,2.75) 2(-3.437,2.25) 3(-3.437,1.75) 4(-3.437,1.25) 5(-3.437,0.75) 6(-3.437,0.25) 7(-3.437,-0.25) 8(-3.437,-0.75) 9(-3.437,-1.25) 10(-3.437,-1.75) 11(-3.437,-2.25) 12(-3.437,-2.75) 25(3.437,-2.75) 26(3.437,-2.25) 27(3.437,-1.75) 28(3.437,-1.25) 29(3.437,-0.75) 30(3.437,-0.25) 31(3.437,0.25) 32(3.437,0.75) 33(3.437,1.25) 34(3.437,1.75) 35(3.437,2.25) 36(3.437,2.75)
  rrect25% 0.25x0.875 smd mask+0.05: 13(-2.75,-3.437) 14(-2.25,-3.437) 15(-1.75,-3.437) 16(-1.25,-3.437) 17(-0.75,-3.437) 18(-0.25,-3.437) 19(0.25,-3.437) 20(0.75,-3.437) 21(1.25,-3.437) 22(1.75,-3.437) 23(2.25,-3.437) 24(2.75,-3.437) 37(2.75,3.437) 38(2.25,3.437) 39(1.75,3.437) 40(1.25,3.437) 41(0.75,3.437) 42(0.25,3.437) 43(-0.25,3.437) 44(-0.75,3.437) 45(-1.25,3.437) 46(-1.75,3.437) 47(-2.25,3.437) 48(-2.75,3.437)
  round 0.5 hole 0.3 mask+0.05: 49(-2.55,-2.55) 49(-2.55,-1.275) 49(-2.55,0) 49(-2.55,1.275) 49(-2.55,2.55) 49(-1.275,2.55) 49(-1.275,-1.275) 49(-1.275,0) 49(-1.275,1.275) 49(-1.275,-2.55) 49(0,2.55) 49(0,1.275) 49(0,0) 49(0,-1.275) 49(0,-2.55) 49(1.275,2.55) 49(1.275,-1.275) 49(1.275,0) 49(1.275,1.275) 49(1.275,-2.55) 49(2.55,-2.55) 49(2.55,-1.275) 49(2.55,0) 49(2.55,1.275) 49(2.55,2.55)
  rect 5.6x5.6 smd paste-5.6 mask+0.05: 49(0,0)
  rect 5.6x5.6 smd far side paste-5.6 mask-5.6: 49(0,0)
  rrect23% 1.084x1.084 on Top Paste mask-1.084: Un1(-1.913,1.913) Un2(-1.913,0.637) Un3(-1.913,-0.637) Un4(-1.913,-1.913) Un5(-0.637,1.913) Un6(-0.637,0.637) Un7(-0.637,-0.637) Un8(-0.637,-1.913) Un9(0.637,1.913) Un10(0.637,0.637) Un11(0.637,-0.637) Un12(0.637,-1.913) Un13(1.913,1.913) Un14(1.913,0.637) Un15(1.913,-0.637) Un16(1.913,-1.913)
  silkscreen extent -3.85,-3.61 3.61,3.94
R_0201_0603Metric [mm]
  rrect25% 0.46x0.4 smd paste-0.46 mask+0.05: 1(-0.32,0) 2(0.32,0)
  rrect25% 0.318x0.36 on Top Paste mask-0.36: Un1(-0.345,0) Un2(0.345,0)
R_0402_1005Metric [mm]
  rrect25% 0.54x0.64 smd mask+0.05: 1(-0.51,0) 2(0.51,0)
  silkscreen extent -0.15,-0.38 0.15,0.38
R_Array_Convex_4x0402 [mm]
  rect 0.5x0.4 smd mask+0.05: 1(-0.5,0.75) 4(-0.5,-0.75) 5(0.5,-0.75) 8(0.5,0.75)
  rect 0.5x0.3 smd mask+0.05: 2(-0.5,0.25) 3(-0.5,-0.25) 6(0.5,-0.25) 7(0.5,0.25)
  silkscreen extent -0.25,-1.18 0.25,1.18
SMA_MyAntenna_A-SMA-KE-16.5A_EdgeMount [mm]
  rect 3.9x1.3 smd paste-3.9 mask+0.05: 1(2.15,0)
  round 0.45 hole 0.3 mask+0.05: 2(0.7,4.2) 2(0.7,3.1) 2(0.7,2) 2(0.7,-2) 2(0.7,-3.1) 2(0.7,-4.2) 2(1.7,2) 2(1.7,3.1) 2(1.7,4.2) 2(1.7,-4.2) 2(1.7,-3.1) 2(1.7,-2) 2(2.7,2) 2(2.7,3.1) 2(2.7,4.2) 2(2.7,-4.2) 2(2.7,-3.1) 2(2.7,-2) 2(3.7,3.1) 2(3.7,4.2) 2(3.7,-2) 2(3.7,2) 2(3.7,-4.2) 2(3.7,-3.1)
  rect 3.9x2.8 smd paste-3.9 mask+0.05: 2(2.15,3.1) 2(2.15,-3.1)
  rect 3.9x2.8 smd far side paste-3.9 mask+0.05: 2(2.15,3.1) 2(2.15,-3.1)
  rect 3.9x9 smd far side paste-9 mask-9: 2(2.15,0)
SOIC-8_5.3x5.3mm_P1.27mm [mm]
  rrect25% 1.625x0.65 smd mask+0.05: 1(-3.588,1.905) 2(-3.588,0.635) 3(-3.588,-0.635) 4(-3.588,-1.905) 5(3.588,-1.905) 6(3.588,-0.635) 7(3.588,0.635) 8(3.588,1.905)
  silkscreen extent -3.76,-2.76 2.76,2.82
SolderJumper-2_P1.3mm_Bridged_RoundedPad1.0x1.5mm [mm]
  rect 1x0.5 smd paste-1 mask+0.05: 1(-0.65,0) 2(0.65,0)
  F.Cu circle w0: c0.65,0.25 r0.5
  F.Cu circle w0: c0.65,-0.25 r0.5
  F.Cu circle w0: c-0.65,0.25 r0.5
  F.Cu circle w0: c-0.65,-0.25 r0.5
  F.Cu region: 0.65,-0.75 0.15,-0.75 0.15,0.75 0.65,0.75
  F.Cu region: -0.15,-0.75 -0.65,-0.75 -0.65,0.75 -0.15,0.75
  F.Cu region: 0.25,-0.3 -0.25,-0.3 -0.25,0.3 0.25,0.3
  silkscreen extent -1.4,-1 1.4,1
SOT-23-3 [mm]
  rrect25% 1.325x0.6 smd mask+0.05: 1(-1.138,0.95) 2(-1.138,-0.95) 3(1.138,0)
  silkscreen extent -1.54,-1.56 0.8,1.84
SOT-353_SC-70-5 [mm]
  rrect25% 0.65x0.4 smd mask+0.05: 1(-0.95,0.65) 2(-0.95,0) 3(-0.95,-0.65) 4(0.95,-0.65) 5(0.95,0.65)
  silkscreen extent -1.32,-1.16 0.7,1.44
SOT-363_SC-70-6 [mm]
  rrect25% 0.65x0.4 smd mask+0.05: 1(-0.95,0.65) 2(-0.95,0) 3(-0.95,-0.65) 4(0.95,-0.65) 5(0.95,0) 6(0.95,0.65)
  silkscreen extent -1.32,-1.16 0.7,1.44
SOT-563 [mm]
  rrect25% 0.675x0.35 smd mask+0.05: 1(-0.713,0.5) 2(-0.713,0) 3(-0.713,-0.5) 4(0.713,-0.5) 5(0.713,0) 6(0.713,0.5)
  silkscreen extent -1.64,-0.93 0.6,0.93
SW_Tactile_SPST_Angled_PTS645Vx58-2LFS [mm]
  round 1.75 hole 0.99 mask+0.05: 1(0,0) 2(4.5,0)
  round 2.1 hole 1.3 mask+0.05: SH(-1.25,-2.49) SH(5.76,-2.49)
  silkscreen extent -1.61,-4.31 6.11,0.9
TestPoint_Loop_D1.80mm_Drill1.0mm_Beaded [mm]
  round 2 hole 1 mask+0.05: 1(0,0)
  silkscreen extent -1.5,-1.5 1.5,1.5
TestPoint_Pad_D1.0mm [mm]
  round 1 smd paste-1 mask+0.05: 1(0,0)
  silkscreen extent -0.7,-0.7 0.7,0.7
Texas_S-PVSON-N10_ThermalVias [mm]
  rrect25% 0.28x0.28 smd paste-0.025 mask+0.05: 1(-1.76,1) 2(-1.76,0.5) 3(-1.76,0) 4(-1.76,-0.5) 5(-1.76,-1) 6(1.76,-1) 7(1.76,-0.5) 8(1.76,0) 9(1.76,0.5) 10(1.76,1)
  rrect100% 0.85x0.28 smd paste-0.025 mask+0.05: 1(-1.475,1) 2(-1.475,0.5) 3(-1.475,0) 4(-1.475,-0.5) 5(-1.475,-1) 6(1.475,-1) 7(1.475,-0.5) 8(1.475,0) 9(1.475,0.5) 10(1.475,1)
  round 0.6 hole 0.3 mask+0.05: 11(-0.5,0.75) 11(-0.5,-0.75) 11(0,0) 11(0.5,0.75) 11(0.5,-0.75)
  rect 0.68x1.05 smd mask+0.05: 11(-0.45,-0.635) 11(-0.45,0.635) 11(0.45,-0.635) 11(0.45,0.635)
  rrect25% 0.28x0.8 smd paste-0.8 mask+0.05: 11(-0.25,1.5) 11(-0.25,-1.5) 11(0.25,1.5) 11(0.25,-1.5)
  rect 0.26x0.5 smd mask+0.05: 11(-0.25,1.6) 11(-0.25,-1.6) 11(0.25,1.6) 11(0.25,-1.6)
  rrect5% 1.65x2.4 smd paste-2.4 mask+0.05: 11(0,0)
  rrect10% 2.3x2.8 smd far side paste-2.8 mask-2.8: 11(0,0)
  silkscreen extent -2.08,-1.63 1.63,1.75
TFBGA-180_12x12mm_Layout14x14_P0.8mm [mm]
  round 0.4 smd mask+0.05: A1(-5.2,5.2) A2(-4.4,5.2) A3(-3.6,5.2) A4(-2.8,5.2) A5(-2,5.2) A6(-1.2,5.2) A7(-0.4,5.2) A8(0.4,5.2) A9(1.2,5.2) A10(2,5.2) A11(2.8,5.2) A12(3.6,5.2) A13(4.4,5.2) A14(5.2,5.2) B1(-5.2,4.4) B2(-4.4,4.4) B3(-3.6,4.4) B4(-2.8,4.4) B5(-2,4.4) B6(-1.2,4.4) B7(-0.4,4.4) B8(0.4,4.4) B9(1.2,4.4) B10(2,4.4) B11(2.8,4.4) B12(3.6,4.4) B13(4.4,4.4) B14(5.2,4.4) C1(-5.2,3.6) C2(-4.4,3.6) C3(-3.6,3.6) C4(-2.8,3.6) C5(-2,3.6) C6(-1.2,3.6) C7(-0.4,3.6) C8(0.4,3.6) C9(1.2,3.6) C10(2,3.6) C11(2.8,3.6) C12(3.6,3.6) C13(4.4,3.6) C14(5.2,3.6) D1(-5.2,2.8) D2(-4.4,2.8) D3(-3.6,2.8) D4(-2.8,2.8) D5(-2,2.8) D6(-1.2,2.8) D7(-0.4,2.8) D8(0.4,2.8) D9(1.2,2.8) D10(2,2.8) D11(2.8,2.8) D12(3.6,2.8) D13(4.4,2.8) D14(5.2,2.8) E1(-5.2,2) E2(-4.4,2) E3(-3.6,2) E4(-2.8,2) E5(-2,2) E6(-1.2,2) E7(-0.4,2) E8(0.4,2) E9(1.2,2) E10(2,2) E11(2.8,2) E12(3.6,2) E13(4.4,2) E14(5.2,2) F1(-5.2,1.2) F2(-4.4,1.2) F3(-3.6,1.2) F4(-2.8,1.2) F5(-2,1.2) F10(2,1.2) F11(2.8,1.2) F12(3.6,1.2) F13(4.4,1.2) F14(5.2,1.2) G1(-5.2,0.4) G2(-4.4,0.4) G3(-3.6,0.4) G4(-2.8,0.4) G5(-2,0.4) G10(2,0.4) G11(2.8,0.4) G12(3.6,0.4) G13(4.4,0.4) G14(5.2,0.4) H1(-5.2,-0.4) H2(-4.4,-0.4) H3(-3.6,-0.4) H4(-2.8,-0.4) H5(-2,-0.4) H10(2,-0.4) H11(2.8,-0.4) H12(3.6,-0.4) H13(4.4,-0.4) H14(5.2,-0.4) J1(-5.2,-1.2) J2(-4.4,-1.2) J3(-3.6,-1.2) J4(-2.8,-1.2) J5(-2,-1.2) J10(2,-1.2) J11(2.8,-1.2) J12(3.6,-1.2) J13(4.4,-1.2) J14(5.2,-1.2) K1(-5.2,-2) K2(-4.4,-2) K3(-3.6,-2) K4(-2.8,-2) K5(-2,-2) K6(-1.2,-2) K7(-0.4,-2) K8(0.4,-2) K9(1.2,-2) K10(2,-2) K11(2.8,-2) K12(3.6,-2) K13(4.4,-2) K14(5.2,-2) L1(-5.2,-2.8) L2(-4.4,-2.8) L3(-3.6,-2.8) L4(-2.8,-2.8) L5(-2,-2.8) L6(-1.2,-2.8) L7(-0.4,-2.8) L8(0.4,-2.8) L9(1.2,-2.8) L10(2,-2.8) L11(2.8,-2.8) L12(3.6,-2.8) L13(4.4,-2.8) L14(5.2,-2.8) M1(-5.2,-3.6) M2(-4.4,-3.6) M3(-3.6,-3.6) M4(-2.8,-3.6) M5(-2,-3.6) M6(-1.2,-3.6) M7(-0.4,-3.6) M8(0.4,-3.6) M9(1.2,-3.6) M10(2,-3.6) M11(2.8,-3.6) M12(3.6,-3.6) M13(4.4,-3.6) M14(5.2,-3.6) N1(-5.2,-4.4) N2(-4.4,-4.4) N3(-3.6,-4.4) N4(-2.8,-4.4) N5(-2,-4.4) N6(-1.2,-4.4) N7(-0.4,-4.4) N8(0.4,-4.4) N9(1.2,-4.4) N10(2,-4.4) N11(2.8,-4.4) N12(3.6,-4.4) N13(4.4,-4.4) N14(5.2,-4.4) P1(-5.2,-5.2) P2(-4.4,-5.2) P3(-3.6,-5.2) P4(-2.8,-5.2) P5(-2,-5.2) P6(-1.2,-5.2) P7(-0.4,-5.2) P8(0.4,-5.2) P9(1.2,-5.2) P10(2,-5.2) P11(2.8,-5.2) P12(3.6,-5.2) P13(4.4,-5.2) P14(5.2,-5.2)
  silkscreen extent -6.5,-6.12 6.12,6.5
TSLP-2-19 [mm]
  rrect12% 0.35x0.6 smd paste-0.6 mask+0.05: 1(-0.325,0) 2(0.325,0)
  rect 0.28x0.45 on Top Paste paste-0.05 mask-0.45: Un1(-0.33,0) Un2(0.33,0)
  silkscreen extent -0.65,-0.45 -0.25,0.45
TSLP-6-4_1.1x0.7mm_P0.4mm [mm]
  rrect12% 0.25x0.25 smd mask+0.05: 1(-0.2,0.4) 2(-0.2,0) 3(-0.2,-0.4) 4(0.2,-0.4) 5(0.2,0) 6(0.2,0.4)
  silkscreen extent -0.73,-0.65 0.45,0.93
TSLP-7-1 [mm]
  rrect12% 0.3x0.35 smd mask+0.05: 1(-0.5,-0.925) 2(0,-0.925) 3(0.5,-0.925) 4(0.5,0.925) 5(0,0.925) 6(-0.5,0.925)
  rrect37% 0.3x0.3 smd mask-0.3: 7(-0.45,0.4) 7(-0.45,-0.4) 7(0.45,0.4) 7(0.45,-0.4)
  rect 0.3x0.3 smd mask-0.3: 7(-0.45,0) 7(0,0.4) 7(0,0) 7(0,-0.4) 7(0.45,0)
  round 0.4 hole 0.3 mask+0.05: 7(-0.35,0.3) 7(-0.35,-0.3) 7(0.35,0.3) 7(0.35,-0.3)
  rrect10% 1.2x1.1 smd paste-1.2 mask+0.05: 7(0,0)
  rrect10% 1.2x1.1 smd far side paste-1.2 mask-1.2: 7(0,0)
  silkscreen extent -0.96,-1.48 0.8,1
TSOP-6_1.65x3.05mm_P0.95mm [mm]
  rect 0.7x0.51 smd mask+0.05: 1(-1.16,0.95) 2(-1.16,0) 3(-1.16,-0.95) 4(1.16,-0.95) 5(1.16,0) 6(1.16,0.95)
  silkscreen extent -1.49,-1.6 0.8,1.78
TSSLP-2-1 [mm]
  rrect12% 0.24x0.32 smd paste-0.32 mask+0.05: 1(-0.19,0) 2(0.19,0)
  rrect50% 0.19x0.27 on Top Paste paste-0.05 mask-0.27: Un1(-0.19,0) Un2(0.19,0)
  silkscreen extent -0.45,-0.3 -0.15,0.3
USB_C_Receptacle_HRO_TYPE-C-31-M-12 [mm]
  rrect25% 0.6x1.45 smd mask+0.05: A1(-3.25,4.045) A4(-2.45,4.045) A9(2.45,4.045) A12(3.25,4.045) B1(3.25,4.045) B4(2.45,4.045) B9(-2.45,4.045) B12(-3.25,4.045)
  rrect25% 0.3x1.45 smd mask+0.05: A5(-1.25,4.045) A6(-0.25,4.045) A7(0.25,4.045) A8(1.25,4.045) B5(1.75,4.045) B6(0.75,4.045) B7(-0.75,4.045) B8(-1.75,4.045)
  rrect100% 1x1.6 hole 1.2 slot 0.6 at 0 deg paste-2539.97 mask+0.05: S1(-4.32,-1.05) S1(4.32,-1.05)
  rrect100% 1x2.1 hole 1.7 slot 0.6 at 0 deg paste-2539.97 mask+0.05: S1(-4.32,3.13) S1(4.32,3.13)
  round 0.65 hole 0.65 mask+0.05: Un1(-2.89,2.6) Un2(2.89,2.6)
  silkscreen extent -4.7,-2.45 4.7,1.9
WSON-8-1EP_2x2mm_P0.5mm_EP0.9x1.6mm [mm]
  rrect25% 0.5x0.25 smd mask+0.05: 1(-0.95,0.75) 2(-0.95,0.25) 3(-0.95,-0.25) 4(-0.95,-0.75) 5(0.95,-0.75) 6(0.95,-0.25) 7(0.95,0.25) 8(0.95,0.75)
  rect 0.9x1.6 smd paste-1.6 mask+0.05: 9(0,0)
  rect 0.75x0.65 on Top Paste mask-0.75: Un1(0,0.4) Un2(0,-0.4)
  silkscreen extent -1.65,-1.14 1,1.35

## Part data
C1 C2 C3 C5 C7 C8 C10 C17 C21 C24 C25 C26 C27 C28 C30 C31 C41 C42 C46 C48 C49 C50 C53 C58 C59 C60 C62 C66 C68 C69 C71 C72 C73 C75 C77 C79 C82 C83 C84 C85 C86 C87 C88 C89 C90 C92 C93 C95 C97 C98 C100 C106 C123 C141 C142 C156 C159 C160 C161: library part C_0201_0603Metric, "Capacitor SMD 0201 (0603 Metric), square (rectangular) end terminal, IPC_7351 nominal, (Body size source: https://www.vishay.com/docs/20052/crcw0201e3.pdf), generated with kicad-footprint-generator", Manufacturer=Murata, Part Number=GRM033R61A105ME44D, Datasheet=~, Description="CAP CER 1UF 10V X5R 0201", Substitution="GRM033R61A105ME44*, GRM033R61C105ME15*, Samsung CL03A105MO3NRN*", ki_fp_filters=C_*
C4: library part C_0201_0603Metric, "Capacitor SMD 0201 (0603 Metric), square (rectangular) end terminal, IPC-7351 nominal, (Body size source: https://www.vishay.com/docs/20052/crcw0201e3.pdf), generated with kicad-footprint-generator", Manufacturer=Murata, Part Number=GRM033R71A332KA01D, Datasheet=~, Description="CAP CER 3300PF 10V X7R 0201", Substitution=GRM033R71A332K*, ki_fp_filters=C_*
C6 C9 C11 C16 C18 C19 C20 C29 C55 C57 C63 C65: library part C_0201_0603Metric, "Capacitor SMD 0201 (0603 Metric), square (rectangular) end terminal, IPC_7351 nominal, (Body size source: https://www.vishay.com/docs/20052/crcw0201e3.pdf), generated with kicad-footprint-generator", Manufacturer=Murata, Part Number=GRM033R71A332KA01D, Datasheet=~, Description="CAP CER 3300PF 10V X7R 0201", Substitution=GRM033R71A332K*, ki_fp_filters=C_*
C12 C13: library part C_0201_0603Metric, "Capacitor SMD 0201 (0603 Metric), square (rectangular) end terminal, IPC_7351 nominal, (Body size source: https://www.vishay.com/docs/20052/crcw0201e3.pdf), generated with kicad-footprint-generator", Manufacturer=Murata, Part Number=GRM0335C1E331JA01D, Datasheet=~, Description="CAP CER 330PF 25V C0G/NP0 0201", Substitution="GRM0335C1E331*, GRM0335C1H331*", ki_fp_filters=C_*
C14: library part C_0201_0603Metric, "Capacitor SMD 0201 (0603 Metric), square (rectangular) end terminal, IPC_7351 nominal, (Body size source: https://www.vishay.com/docs/20052/crcw0201e3.pdf), generated with kicad-footprint-generator", Manufacturer=Murata, Part Number=GRM0335C1H8R2CA01D, Datasheet=~, Description="CAP CER 8.2PF 50V C0G/NP0 0201", Substitution=GRM0335C1H8R2*, ki_fp_filters=C_*
C15 C107 C108: library part C_0201_0603Metric, "Capacitor SMD 0201 (0603 Metric), square (rectangular) end terminal, IPC_7351 nominal, (Body size source: https://www.vishay.com/docs/20052/crcw0201e3.pdf), generated with kicad-footprint-generator", Manufacturer=Murata, Part Number=GRM0335C1H181JA01D, Datasheet=~, Description="CAP CER 180PF 50V C0G/NP0 0201", Substitution=GRM0335C1H181*, ki_fp_filters=C_*
C22 C23 C173: library part C_0402_1005Metric, "Capacitor SMD 0402 (1005 Metric), square (rectangular) end terminal, IPC_7351 nominal, (Body size source: IPC-SM-782 page 76, https://www.pcb-3d.com/wordpress/wp-content/uploads/ipc-sm-782a_amendment_1_and_2.pdf), generated with kicad-footprint-generator", Part Number=CL05A105KA5NQNC, Manufacturer=Samsung, Datasheet=~, Description="CAP CER 1UF 25V X5R 0402", Substitution="Murata GRM155R61E105KA12D", ki_fp_filters=C_*
C32 C33 C39 C40 C43 C64 C80 C81 C110 C113 C119 C120 C121 C122 C124 C128 C129 C130 C131 C132 C133 C134 C135 C136 C137 C138 C140 C144 C162 C168: library part C_0402_1005Metric, "Capacitor SMD 0402 (1005 Metric), square (rectangular) end terminal, IPC_7351 nominal, (Body size source: IPC-SM-782 page 76, https://www.pcb-3d.com/wordpress/wp-content/uploads/ipc-sm-782a_amendment_1_and_2.pdf), generated with kicad-footprint-generator", Manufacturer=Samsung, Part Number=CL05A105KA5NQNC, Datasheet=~, Description="CAP CER 1UF 25V X5R 0402", Substitution="Murata GRM155R61E105KA12D", ki_fp_filters=C_*
C34 C35 C36 C37 C67 C109 C125: library part C_0201_0603Metric, "Capacitor SMD 0201 (0603 Metric), square (rectangular) end terminal, IPC_7351 nominal, (Body size source: https://www.vishay.com/docs/20052/crcw0201e3.pdf), generated with kicad-footprint-generator", Manufacturer=Murata, Part Number=GRM0335C1H330JA01D, Datasheet=~, Description="CAP CER 33PF 50V C0G/NP0 0201", Substitution="GRM0335C1H330*, GRM0335C1E330*", ki_fp_filters=C_*
C44 C70: library part C_0201_0603Metric, "Capacitor SMD 0201 (0603 Metric), square (rectangular) end terminal, IPC_7351 nominal, (Body size source: https://www.vishay.com/docs/20052/crcw0201e3.pdf), generated with kicad-footprint-generator", Manufacturer=Murata, Part Number=GRM0335C1E101JA01D, Datasheet=~, Description="CAP CER 100PF 25V C0G/NP0 0201", Substitution="GRM0335C1E101JA01*, GRM0335C1H101JA01*", ki_fp_filters=C_*
C45: library part C_0201_0603Metric, "Capacitor SMD 0201 (0603 Metric), square (rectangular) end terminal, IPC_7351 nominal, (Body size source: https://www.vishay.com/docs/20052/crcw0201e3.pdf), generated with kicad-footprint-generator", Manufacturer=Murata, Part Number=GRM033R71A222KA01D, Datasheet=~, Description="CAP CER 2200PF 10V X7R 0201", Substitution=GRM033R71A222KA01*, ki_fp_filters=C_*
C47: library part C_0201_0603Metric, "Capacitor SMD 0201 (0603 Metric), square (rectangular) end terminal, IPC_7351 nominal, (Body size source: https://www.vishay.com/docs/20052/crcw0201e3.pdf), generated with kicad-footprint-generator", Manufacturer=Murata, Part Number=GRM0335C1H680JA01D, Datasheet=~, Description="CAP CER 68PF 50V C0G/NP0 0201", Substitution=GRM0335C1H680JA01*, ki_fp_filters=C_*
C51 C61 C101 C103: library part C_0201_0603Metric, "Capacitor SMD 0201 (0603 Metric), square (rectangular) end terminal, IPC_7351 nominal, (Body size source: https://www.vishay.com/docs/20052/crcw0201e3.pdf), generated with kicad-footprint-generator", Manufacturer=Murata, Part Number=GRM0335C1ER70WA01D, Tolerance=±0.05, Datasheet=~, Description="CAP CER 0.7PF 25V C0G/NP0 0201", Substitution="GRM0335C1HR70W*, GRM0335C1ER70W*", ki_fp_filters=C_*
C52 C78 C94 C139 C187 C189 C190 C191 C192 C193 C194 C195 C202 C203 C206 C207 C208 C210 C211 C212: library part C_0201_0603Metric, "Capacitor SMD 0201 (0603 Metric), square (rectangular) end terminal, IPC-7351 nominal, (Body size source: https://www.vishay.com/docs/20052/crcw0201e3.pdf), generated with kicad-footprint-generator", Manufacturer=Murata, Part Number=GRM033R61A105ME44D, Datasheet=~, Description="CAP CER 1UF 10V X5R 0201", ki_fp_filters=C_*
  C52 C78 C94 C139 C187 C189 C190 C191 C192 C193 C194 C195 C206 C207 C208 C210 C211 C212: Substitution="GRM033R61A105ME44*, GRM033R61C105ME15*, Samsung CL03A105MO3NRN*"
  C202: Substitution=GRM033R71A222KA01*
  C203: Substitution=GRM0335C1H8R2*
C54 C56: library part C_0201_0603Metric, "Capacitor SMD 0201 (0603 Metric), square (rectangular) end terminal, IPC_7351 nominal, (Body size source: https://www.vishay.com/docs/20052/crcw0201e3.pdf), generated with kicad-footprint-generator", Manufacturer=Murata, Part Number=GRM0335C1E1R8WA01D, Tolerance=±0.05, Datasheet=~, Description="CAP CER 1.8PF 25V C0G/NP0 0201", Substitution="GRM0335C1H1R8W*, GRM0335C1E1R8W*", ki_fp_filters=C_*
C74 C76: library part C_0201_0603Metric, "Capacitor SMD 0201 (0603 Metric), square (rectangular) end terminal, IPC-7351 nominal, (Body size source: https://www.vishay.com/docs/20052/crcw0201e3.pdf), generated with kicad-footprint-generator", Manufacturer=Murata, Part Number=GRM0335C1H181JA01D, Datasheet=~, Description="CAP CER 180PF 50V C0G/NP0 0201", Substitution=GRM0335C1H181*, ki_fp_filters=C_*
C91 C96: library part C_0201_0603Metric, "Capacitor SMD 0201 (0603 Metric), square (rectangular) end terminal, IPC_7351 nominal, (Body size source: https://www.vishay.com/docs/20052/crcw0201e3.pdf), generated with kicad-footprint-generator", Manufacturer=Murata, Part Number=GRM0335C1E1R6WA01D, Tolerance=±0.05, Datasheet=~, Description="CAP CER 1.6PF 25V C0G/NP0 0201", Substitution="GRM0335C1H1R6W*, GRM0335C1E1R6W*", ki_fp_filters=C_*
C99 C102 C115: library part C_0201_0603Metric, "Capacitor SMD 0201 (0603 Metric), square (rectangular) end terminal, IPC_7351 nominal, (Body size source: https://www.vishay.com/docs/20052/crcw0201e3.pdf), generated with kicad-footprint-generator", Manufacturer=Murata, Part Number=GRM0335C1H220JA01D, Datasheet=~, Description="CAP CER 22PF 50V C0G/NP0 0201", Substitution=GRM0335C1H220*, ki_fp_filters=C_*
C104 C111: library part C_0201_0603Metric, "Capacitor SMD 0201 (0603 Metric), square (rectangular) end terminal, IPC_7351 nominal, (Body size source: https://www.vishay.com/docs/20052/crcw0201e3.pdf), generated with kicad-footprint-generator", Manufacturer=Murata, Part Number=GRM0335C1E4R3CA01D, Datasheet=~, Description="CAP CER 4.3PF 25V C0G/NP0 0201", Substitution="GRM0335C1E4R3*, GRM0335C1H4R3*", ki_fp_filters=C_*
C105 C126 C127 C145 C146 C154 C163 C165 C166 C167 C169 C170 C172 C175 C181 C182 C184: library part C_0805_2012Metric, "Capacitor SMD 0805 (2012 Metric), square (rectangular) end terminal, IPC_7351 nominal, (Body size source: IPC-SM-782 page 76, https://www.pcb-3d.com/wordpress/wp-content/uploads/ipc-sm-782a_amendment_1_and_2.pdf, https://docs.google.com/spreadsheets/d/1BsfQQcO9C6DZCsRaXUlFlo91Tg2WpOkGARC1WS5S8t0/edit?usp=sharing), generated with kicad-footprint-generator", Manufacturer=Samsung, Part Number=CL21A106KOQNNNE, Datasheet=~, Description="CAP CER 10UF 16V X5R 0805", Substitution="Murata GRM21BR61A106KE19L", ki_fp_filters=C_*
C112: library part C_0201_0603Metric, "Capacitor SMD 0201 (0603 Metric), square (rectangular) end terminal, IPC-7351 nominal, (Body size source: https://www.vishay.com/docs/20052/crcw0201e3.pdf), generated with kicad-footprint-generator", Manufacturer=Murata, Part Number=GRM0335C1E101JA01D, Datasheet=~, Description="CAP CER 100PF 25V C0G/NP0 0201", Substitution="GRM0335C1E101JA01*, GRM0335C1H101JA01*", ki_fp_filters=C_*
C114 C188 C209: library part C_0201_0603Metric, "Capacitor SMD 0201 (0603 Metric), square (rectangular) end terminal, IPC-7351 nominal, (Body size source: https://www.vishay.com/docs/20052/crcw0201e3.pdf), generated with kicad-footprint-generator", Manufacturer=Murata, Part Number=GRM0335C1ER30BA01D, Datasheet=~, Description="CAP CER 0.3PF 25V C0G/NP0 0201", Substitution="GRM0335C1*R30*A01*, GRM0335C2*R30*A01*", ki_fp_filters=C_*
C116: library part C_0201_0603Metric, "Capacitor SMD 0201 (0603 Metric), square (rectangular) end terminal, IPC_7351 nominal, (Body size source: https://www.vishay.com/docs/20052/crcw0201e3.pdf), generated with kicad-footprint-generator", Manufacturer=Murata, Part Number=GRM0335C1E470JA01D, Datasheet=~, Description="CAP CER 47PF 25V C0G/NP0 0201", Substitution="GRM0335C1E470JA01*, GRM0335C1H470JA01*", ki_fp_filters=C_*
C117: library part C_0805_2012Metric, "Capacitor SMD 0805 (2012 Metric), square (rectangular) end terminal, IPC-7351 nominal, (Body size source: IPC-SM-782 page 76, https://www.pcb-3d.com/wordpress/wp-content/uploads/ipc-sm-782a_amendment_1_and_2.pdf, https://docs.google.com/spreadsheets/d/1BsfQQcO9C6DZCsRaXUlFlo91Tg2WpOkGARC1WS5S8t0/edit?usp=sharing), generated with kicad-footprint-generator", Part Number=CL21A106KOQNNNE, Manufacturer=Samsung, Datasheet=~, Description="CAP CER 10UF 16V X5R 0805", Substitution="Murata GRM155R61E105KA12D", ki_fp_filters=C_*
C118 C157 C158 C164: library part C_0402_1005Metric, "Capacitor SMD 0402 (1005 Metric), square (rectangular) end terminal, IPC_7351 nominal, (Body size source: IPC-SM-782 page 76, https://www.pcb-3d.com/wordpress/wp-content/uploads/ipc-sm-782a_amendment_1_and_2.pdf), generated with kicad-footprint-generator", Manufacturer=Samsung, Part Number=CL05C180JB5NNNC, Datasheet=~, Description="CAP CER 18PF 50V 5% C0G/NP0 0402", Substitution="Murata GRM1555C1H180JA01D", ki_fp_filters=C_*
C143 C147: library part C_0805_2012Metric, "Capacitor SMD 0805 (2012 Metric), square (rectangular) end terminal, IPC_7351 nominal, (Body size source: IPC-SM-782 page 76, https://www.pcb-3d.com/wordpress/wp-content/uploads/ipc-sm-782a_amendment_1_and_2.pdf, https://docs.google.com/spreadsheets/d/1BsfQQcO9C6DZCsRaXUlFlo91Tg2WpOkGARC1WS5S8t0/edit?usp=sharing), generated with kicad-footprint-generator", Manufacturer=Samsung, Part Number=CL21A226MAYNNNE, Datasheet=~, Description="CAP CER 22UF 25V X5R 0805", Substitution="Murata GRM21BR61A106KE19L", ki_fp_filters=C_*
C148 C149 C150 C174 C176 C177 C178 C179 C183: library part C_0201_0603Metric, "Capacitor SMD 0201 (0603 Metric), square (rectangular) end terminal, IPC_7351 nominal, (Body size source: https://www.vishay.com/docs/20052/crcw0201e3.pdf), generated with kicad-footprint-generator", Part Number=GRM033R61A105ME44D, Manufacturer=Murata, Datasheet=~, Description="CAP CER 1UF 10V X5R 0201", Substitution="GRM033R61A105ME44*, GRM033R61C105ME15*, Samsung CL03A105MO3NRN*", ki_fp_filters=C_*
C151 C152: library part C_0201_0603Metric, "Capacitor SMD 0201 (0603 Metric), square (rectangular) end terminal, IPC_7351 nominal, (Body size source: https://www.vishay.com/docs/20052/crcw0201e3.pdf), generated with kicad-footprint-generator", Part Number=GRM0335C1E331JA01D, Manufacturer=Murata, Datasheet=~, Description="CAP CER 330PF 25V C0G/NP0 0201", Substitution="GRM0335C1E331*, GRM0335C1H331*", ki_fp_filters=C_*
C153 C155 C180: library part C_0402_1005Metric, "Capacitor SMD 0402 (1005 Metric), square (rectangular) end terminal, IPC_7351 nominal, (Body size source: IPC-SM-782 page 76, https://www.pcb-3d.com/wordpress/wp-content/uploads/ipc-sm-782a_amendment_1_and_2.pdf), generated with kicad-footprint-generator", Manufacturer=Samsung, Part Number=CL05A104KA5NNNC, Datasheet=~, Description="CAP CER 0.1UF 25V X5R 0402", Substitution="Murata GRM155R61A104KA01D", ki_fp_filters=C_*
C171 C199: library part C_0402_1005Metric, "Capacitor SMD 0402 (1005 Metric), square (rectangular) end terminal, IPC-7351 nominal, (Body size source: IPC-SM-782 page 76, https://www.pcb-3d.com/wordpress/wp-content/uploads/ipc-sm-782a_amendment_1_and_2.pdf), generated with kicad-footprint-generator", Manufacturer=Samsung, Part Number=CL05A105KA5NQNC, Datasheet=~, Description="CAP CER 1UF 25V X5R 0402", Substitution="Murata GRM155R61E105KA12D", ki_fp_filters=C_*
C185 C196 C205: library part C_0201_0603Metric, "Capacitor SMD 0201 (0603 Metric), square (rectangular) end terminal, IPC-7351 nominal, (Body size source: https://www.vishay.com/docs/20052/crcw0201e3.pdf), generated with kicad-footprint-generator", Part Number=GRM033R61A105ME44D, Manufacturer=Murata, Datasheet=~, Description="CAP CER 1UF 10V X5R 0201", Substitution="GRM033R61A105ME44*, GRM033R61C105ME15*, Samsung CL03A105MO3NRN*", ki_fp_filters=C_*
C186 C197 C200 C201 C204: library part C_0805_2012Metric, "Capacitor SMD 0805 (2012 Metric), square (rectangular) end terminal, IPC-7351 nominal, (Body size source: IPC-SM-782 page 76, https://www.pcb-3d.com/wordpress/wp-content/uploads/ipc-sm-782a_amendment_1_and_2.pdf, https://docs.google.com/spreadsheets/d/1BsfQQcO9C6DZCsRaXUlFlo91Tg2WpOkGARC1WS5S8t0/edit?usp=sharing), generated with kicad-footprint-generator", Manufacturer=Samsung, Part Number=CL21A106KOQNNNE, Datasheet=~, Description="CAP CER 10UF 16V X5R 0805", Substitution="Murata GRM21BR61A106KE19L", ki_fp_filters=C_*
C198: library part C_0201_0603Metric, "Capacitor SMD 0201 (0603 Metric), square (rectangular) end terminal, IPC-7351 nominal, (Body size source: https://www.vishay.com/docs/20052/crcw0201e3.pdf), generated with kicad-footprint-generator", Manufacturer=Murata, Part Number=GRM0335C1ER70WA01D, Datasheet=~, Description="CAP CER 0.7PF 25V C0G/NP0 0201", Substitution="GRM0335C1HR70W*, GRM0335C1ER70W*", ki_fp_filters=C_*
D1: library part TSSLP-2-1, "https://www.infineon.com/cms/en/product/packages/PG-TSSLP/PG-TSSLP-2-1/", Manufacturer=Nexperia, Part Number=PESD5V0H1BSFYL, Datasheet=~, Description="Bidirectional transient-voltage-suppression diode", Substitution=PESD5V0H1BSF, ki_fp_filters="TO-???* *_Diode_* *SingleDiode* D_*"
D2: library part LED_Single_Xinglight_XL-3210_Horizontal, "LED, right-angle, clear, http://www.xinglight.cn/uploadfile/202212/7a7994c6a7a4fd8.pdf", Manufacturer=Xinglight, Part Number=XL-3210UGC, Datasheet=http://www.xinglight.cn/uploadfile/202212/7a7994c6a7a4fd8.pdf, Description="LED GREEN 1204 SMD,1.5X3.2MM", Sim.Pins="1=K 2=A", ki_fp_filters="LED* LED_SMD:* LED_THT:*"
D3 D9: library part TSLP-2-19, "https://www.infineon.com/cms/en/product/packages/PG-TSLP/PG-TSLP-2-19/", Manufacturer=Slkor, Part Number=SLESD0301L, Description="TVS DIODE 3.3V UNIDIRECTIONAL DFN1006", ki_fp_filters="TO-???* *_Diode_* *SingleDiode* D_*"